# Altium PCB WirelessAudioSpeaker.PcbDoc (part 2 of 2)
Units mm, origin at the board's own origin, x right, y up, seen from the top; angles counter-clockwise.
Board outline 50.68 x 47.13 mm, 2 copper layers (Top Layer, Bottom Layer); 94 components, 57 nets, 349 pads, 621 vias.
Unrouted connection lines stored in the file: 2.
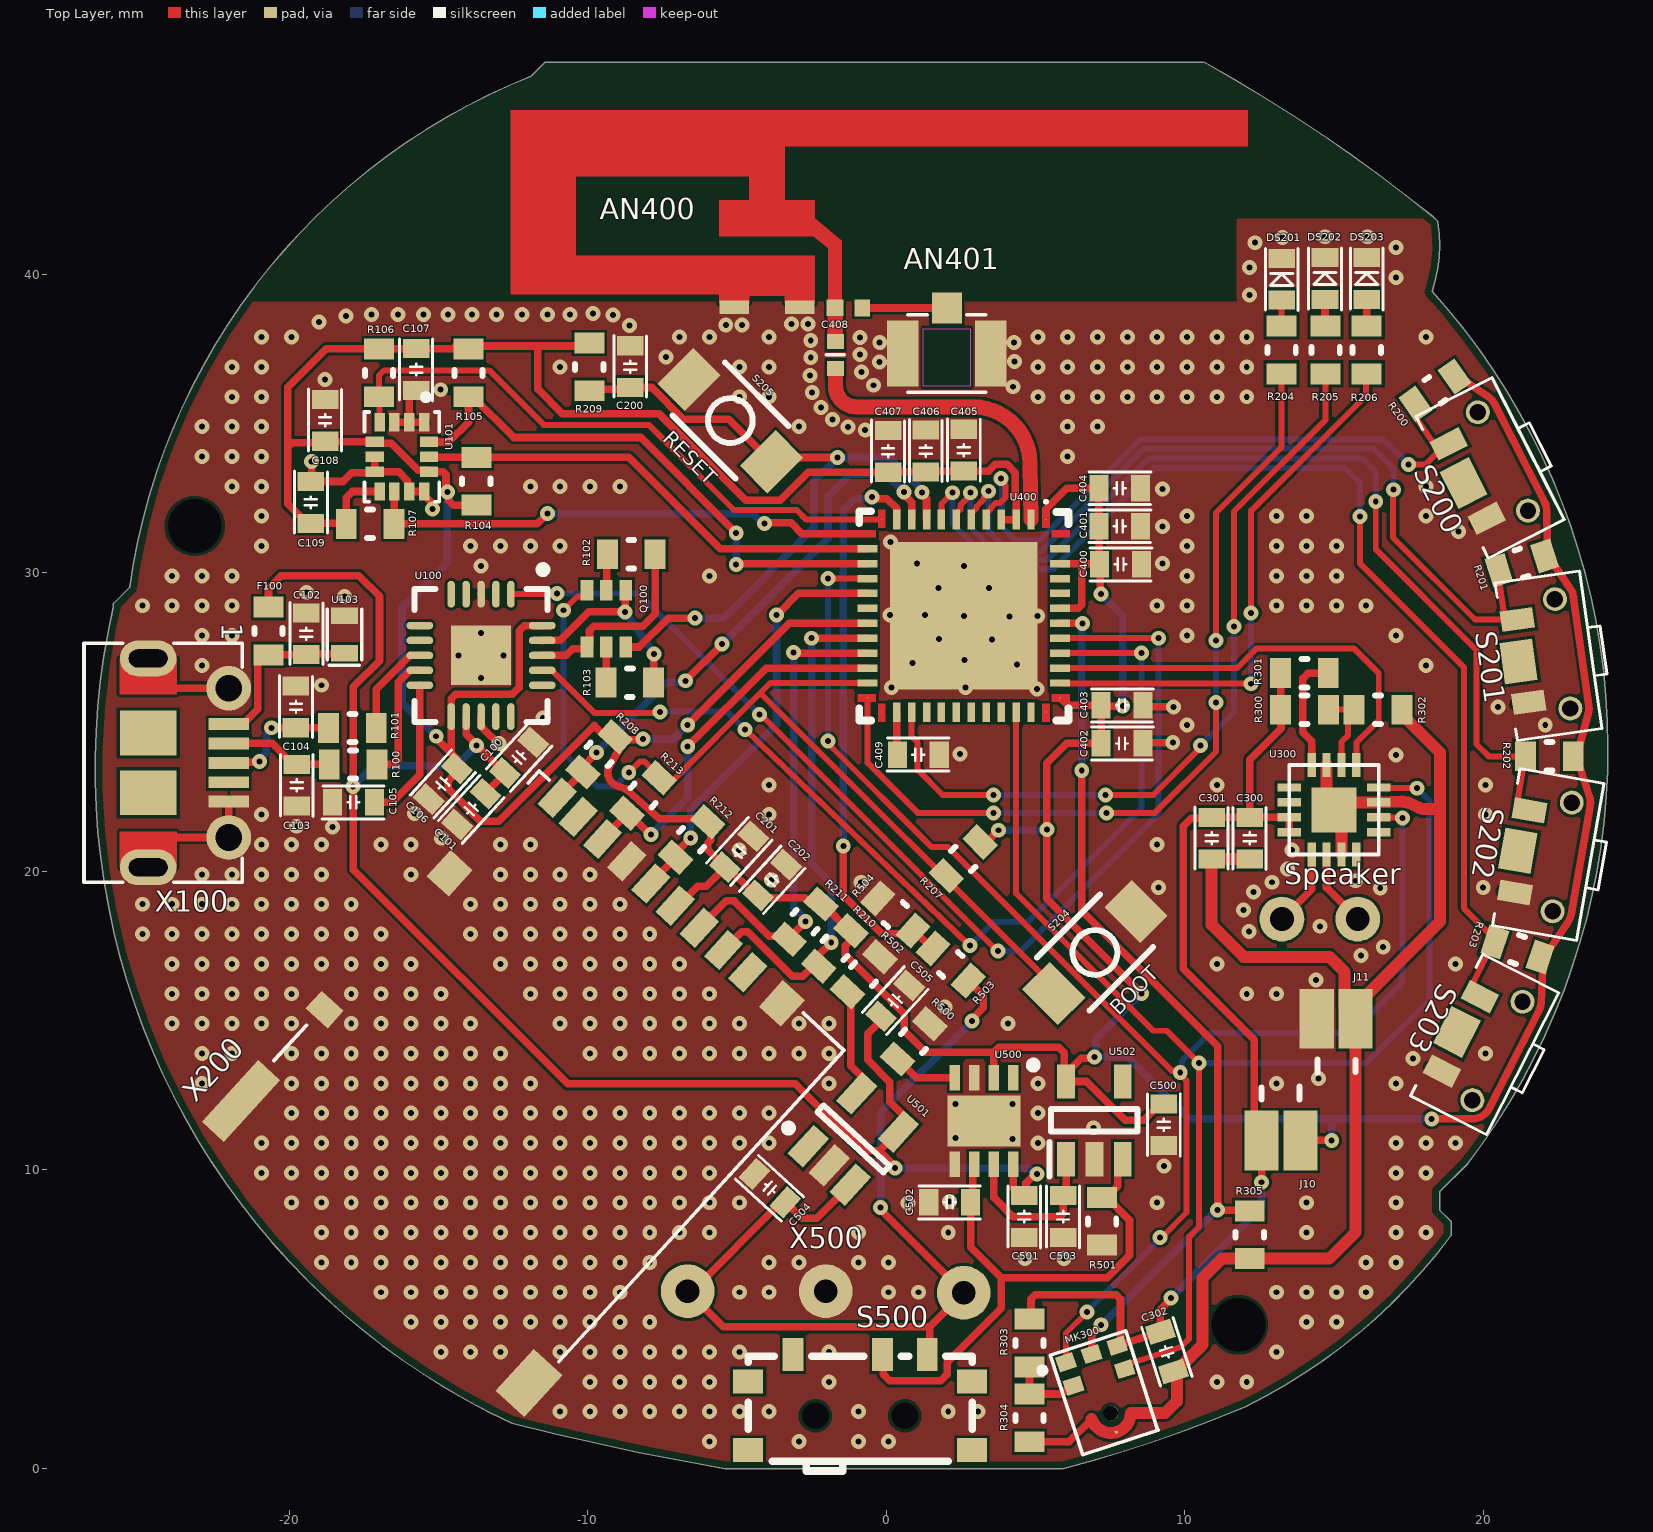
[diagram p0: Top Layer view]

## Via types
v1: diameter 0.5, hole 0.2, Top Layer to Bottom Layer, tented both sides, 621 vias

## Nets (pads, with @x,y where several pads share a name; then routed paths per layer and width w, separated by ;. In a path a pad name is that pad's centre, name@x,y a point inside that pad or via, vN(x,y) a via of type N, cw(c..) or ccw(c..) an arc to the next point about the centre after c; other vN are vias at no path point) (continued)
OUTP: (continued)
  Top Layer w0.254: Speaker.1 14.25,19.387 U300.9
RXD: U100.1 U400.41 | length 37.7
  Top Layer w0.2: U100.1 v1@-11.05,29.275 ; v1(-4.25,25.25) -4.212,25.25 3.713,17.325 v1(3.75,17.325) ; U400.41 v1(9.125,27.8)
  Bottom Layer w0.2: v1(-11.033,29.296) -8.296,29.296 v1(-4.25,25.25) ; v1(3.75,17.325) 4.525,17.325 9.125,21.925 v1(9.125,27.8)
SCL: R104.1 U101.13 U400.14 | length 16
  Top Layer w0.254: U101.13 -15.307,33.867 -13.739,33.867 R104.1 -8.621,33.859 -5.563,30.8 U400.14
SDA: R105.1 U101.14 U400.15 | length 18.8
  Top Layer w0.254: U101.14 -14.65,34.375 -13.994,35.031 R105.1 -13.844,35.891 -12.478,34.525 -8.225,34.525 v1(-5.025,31.325) ; v1(-5.025,30.275) -5,30.3 U400.15
  Bottom Layer w0.254: v1(-5.025,30.275) v1(-5.025,31.325)
TXD: U100.17 U400.40 | length 33.7
  Top Layer w0.2: U100.17 -11.2,26.725 -9.767,25.292 -7.608,25.292 v1(-7.575,25.325) ; v1(-4.733,24.746) v1(2.8,17.5) ; U400.40 v1(8.55,27.3)
  Bottom Layer w0.2: v1(-7.575,25.325) -7.55,25.35 -5.337,25.35 v1(-4.733,24.746) ; v1(2.8,17.5) 3.6,18.3 4.75,18.3 8.55,22.1 v1(8.55,27.3)
USB_5V: C100.2 C101.2 C501.2 C505.2 F100.2 U100.12 U500.8 U501.4 | length 57.3
  Top Layer w0.254: F100.2 -20.694,29.481 -20.275,29.9 -17.675,29.9 -16.975,29.2 -16.975,27.05 -17.85,26.175 -17.85,20.05 -10.675,12.875 -3.043,12.875 -0.793,10.625 -0.232,10.625 ; U100.12 -14.073,25.173 -14.073,24.584 C100.2 -12.773,23.265 -13.427,22.61 C101.2 ; C505.2 -0.173,15.002 -0.625,14.55 -0.625,13.675 0.125,12.925 0.125,12.271 0.592,11.804 0.592,11.449 U501.4 -0.232,10.625 ; v1(0.3,10.05) 0.3,10.093 -0.232,10.625 ; U500.8 4.25,9.375 4.5,9.125 4.683,9.308 4.683,9.55 4.983,9.85 v1(5.05,9.85)
  Bottom Layer w0.254: v1(-17.857,22.837) -17.17,23.525 -14.409,23.525 v1(-13.721,24.212) ; v1(0.3,10.05) 4.783,10.05 4.983,9.85 v1(5.05,9.85)
USBDM: R100.2 U100.9 | length 4.3
  Top Layer w0.254: R100.2 -17.053,23.575 -16.499,23.575 -16.35,23.724 -16.35,26.323 -16.096,26.577 -16.094,26.577 -15.946,26.725 U100.9
USBDP: R101.2 U100.8 | length 2.9
  Top Layer w0.254: R101.2 -17.084,26.09 -16.094,27.079 -16.092,27.079 U100.8@-15.948,27.223
VBAT: C504.2 R503.2 S500.3 U501.3 X500.1 X500.3 | length 31.9
  Top Layer w0.254: U501.3 -2.334,8.375 -2.831,8.375 -3.358,8.902 C504.2 -3.525,8.902 -6.503,5.925 X500.1 -5.459,4.731 1.454,4.731 ; v1(-0.186,8.726) -0.139,8.679 -0.139,8.611 X500.3 1.454,4.731 ; S500.3 1.454,3.879 1.454,4.731 ; R503.2 3.25,15.826 3.25,15.417 2.875,15.042 v1(2.875,14.975) ; v1@2.895,14.955 v1@2.9,14.95 ; R503.2@2.895,16.528 R503.2@2.996,16.629
  Bottom Layer w0.254: v1(-0.186,8.726) -0.186,11.914 v1(2.875,14.975)
VBAT_S: C502.2 R501.2 S500.2 U500.6 U502.3 | length 19.6
  Top Layer w0.254: S500.2 -0.1,3.775 -0.1,3.15 0.125,2.925 1.825,2.925 2.05,3.15 2.05,3.55 3.85,5.35 3.85,6.375 ; U500.6 2.902,10.127 2.902,8.977 C502.2 2.825,7.4 3.85,6.375 ; U502.3 7.752,10.177 7.752,9.437 7.381,9.066 8.15,8.297 8.15,7.125 7.4,6.375 3.85,6.375
pads on no net: MK300. S200.0 S200.3 S201.0 S201.3 S202.0 S202.3 S203.0 S203.3 S500.0 S500.1 U100.2 U100.4 U100.5 U100.6 U100.7 U100.14 U100.15 U100.16 U300.5 U300.6 U300.12 U300.13 U400.18 U400.25 U400.28 U400.29 U400.30 U400.31 U400.32 U400.33 U400.35 U400.36 U400.44 U400.45 U400.47 U400.48 U500.1 U501.1 U502.4 X100.4 X100.10 X100.11 X200.1 X200.8

## Polygon pours and split planes (outlines as drawn)
GND on Bottom Layer "GND_L02_P004" (solid, pour order 4): -21.227,39.075 11.75,39.075 11.75,41.84 11.76,41.85 21.2,41.85 30.575,32.475 30.575,11.85 16.3,-2.425 -21.65,-2.425 -30.05,5.975 -30.05,30.252
GND on Top Layer "GND_L01_P001" (solid, pour order 1): -21.227,39.075 11.75,39.075 11.75,41.84 11.76,41.85 24,41.85 28.5,37.35 28.5,4.825 16.75,-6.925 -20.05,-6.925 -34.7,7.725 -34.7,30.15

## Silkscreen, mask and mechanical layers (free items; w line width, h text height)
Top Overlay:
  text "RESET" at -7.525,34.45 h0.5 r315
  text "BOOT" at 7.786,15.136 h0.5 r45
Mechanical 1:
  the board outline again, w0.254

## Text inside footprints (layer, text, board x,y; h text height)
U103: Mechanical 14 "K" at -17.845,27.036 h1 r90
X100: Top Overlay "1" at -22.492,28.324 h1.2 r270; Mechanical 14 "1" at -22.625,25.175 h1.5 r270
X500: Mechanical 3 "+" at -7.13,3.573 h2; Mechanical 3 "+" at 2.141,6.861 h2; Mechanical 3 "-" at -2.228,6.912 h2